# Altium PCB PCB_OLD old.PcbDoc
Units mm, origin at the board's own origin, x right, y up, seen from the top; angles counter-clockwise.
Board outline 65 x 33 mm, 2 copper layers (Top Layer, Bottom Layer); 45 components, 29 nets, 179 pads, 91 vias.
Unrouted connection lines stored in the file: 18.
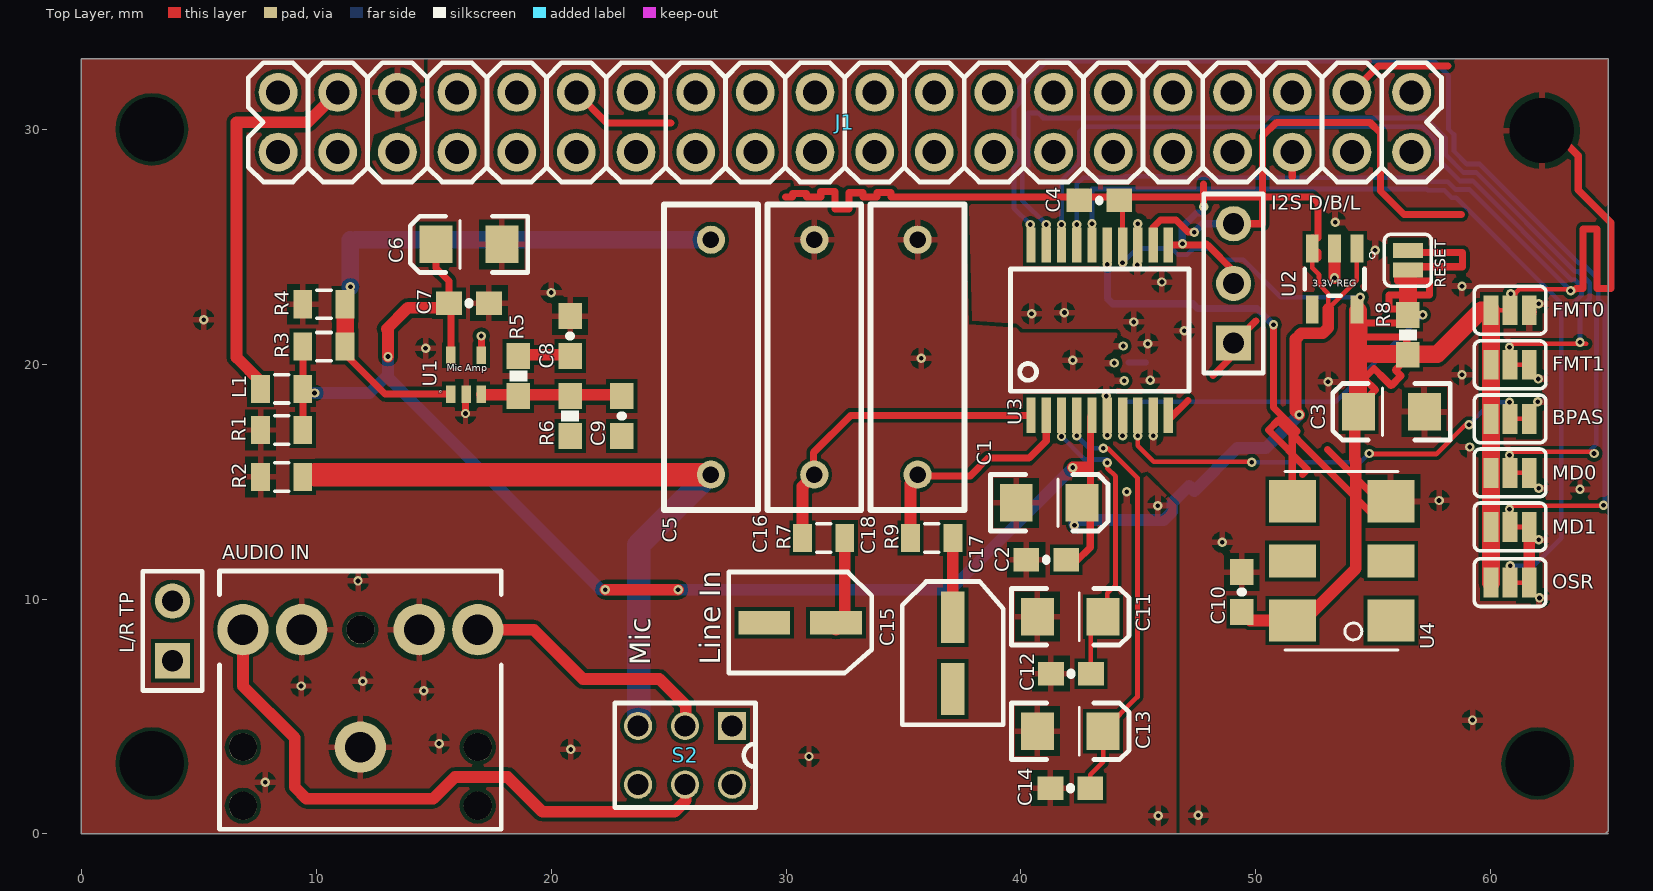
[diagram p0: Top Layer view]
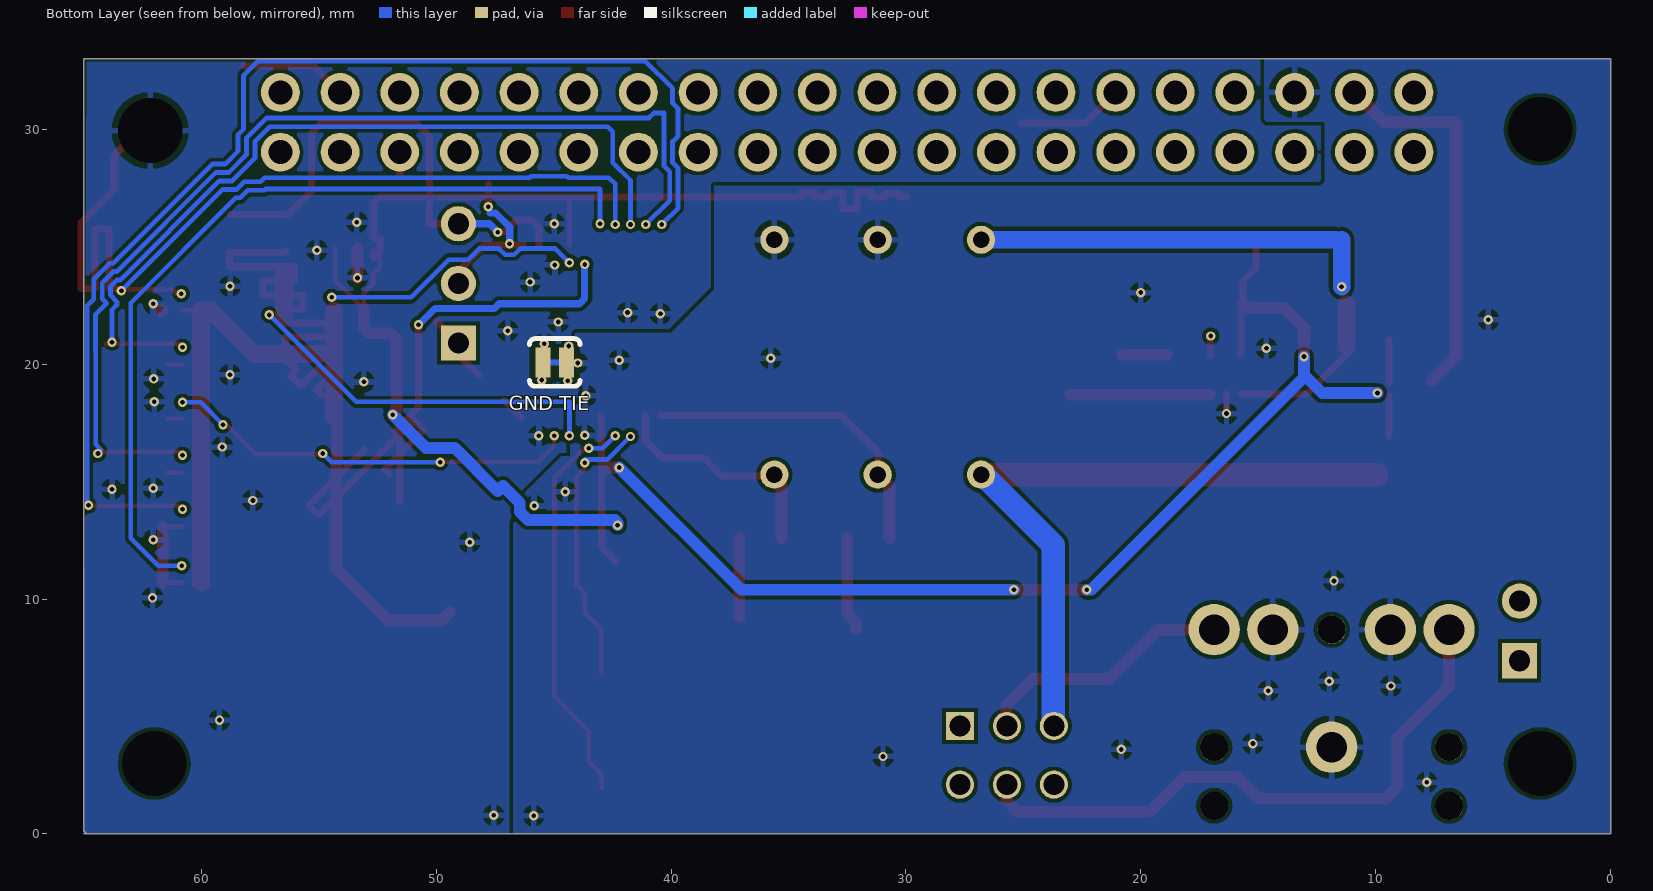
[diagram p1: Bottom Layer view, seen from below]

## Layer stack, top to bottom
Top Solder: solder mask 0.0102, Solder Resist, Dk 3.5
Top Layer: signal copper 0.0356
Dielectric 1: dielectric 0.32, FR-4, Dk 4.8
Bottom Layer: signal copper 0.0356
Bottom Solder: solder mask 0.0102, Solder Resist, Dk 3.5

## Board outline
0,0 65,0 64.875,0 65,0.125 65,33 0,33

## Design rules (kind name [scope] priority, off if disabled: settings)
Clearance [All] p1: gap=0.16
ComponentClearance [All] p1: gap=0.1 collisioncheckmode=3 verticalgap=0.1 showdistances=FALSE
HoleSize [All] p1: absolutevalues=TRUE maxlimit=5 minlimit=0.025 maxpercent=80.000 minpercent=20.000
MatchedLengths I2S [InNetClass('I2S')] p1: tolerance=10 checknetsindiffpair=FALSE checkdiffpairvsdiffpair=TRUE checkxsignals=TRUE checkothers=TRUE
MinimumSolderMaskSliver [All] p1: minsoldermaskwidth=0.004
PolygonConnect [All] p1: connectstyle=Relief reliefconductorwidth=0.254 reliefentries=4 polygonreliefangle="90 Angle" airgapwidth=0.254
RoutingVias [All] p1: holewidth=0.5 width=0.8 viastyle="Through Hole" minholewidth=0.2 minwidth=0.4 maxholewidth=1 maxwidth=1.5
SilkToSilkClearance [All] p1: silktosilkclearance=0.1
SilkToSolderMaskClearance [IsPad] p1 off: minsilkscreentomaskgap=0.07 clearancetoexposedcopper=TRUE
SolderMaskExpansion [All] p1: expansion=0.01
Width [All] p1: maxlimit=1 minlimit=0.2 preferedwidth=0.25
25 further rules are at their usual default settings.

## Classes and differential pairs
component class Schematic: BPAS FMT0 FMT1 MD0 MD1 OSR "SCK tp"
net class I2S: BCK DOUT LRCK

## Components (designator, comment, footprint, x,y, rotation, side; value= is the part's Value field where it differs from the comment)
"AUDIO IN" "Stereo jack with bypass switches. Ground when NC" AUDIO-JACK 11.875,3.7 r90 top
BPAS "" PAD-JUMPER-3-2OF3_NC_BY_TRACE_YES_SILK_FULL_BOX 60.825,17.675 r0 top net-tie
C1 "10uF" EIA3216 41.2,14.1 r0 top
C2 "0.1uF" 0603-CAP 41.075,11.675 r180 top
C3 "10uF" EIA3216 55.775,17.975 r180 top
C4 "0.1uF" 0603-CAP 43.333,26.975 r180 top
C5 "0.01uF Film" "WIMA PCM 10" 26.8,13.8 r90 top
C6 "10uF" EIA3216 16.5,25.1 r180 top
C7 "0.1uF" 0603-CAP 16.5,22.6 r0 top
C8 "1uF" 0603-CAP 20.8,21.2 r90 top
C9 "100pF" 0603-CAP 23,17.8 r270 top
C10 "0.01uF" 0603-CAP 49.4,10.3 r90 top
C11 "10uF" EIA3216 42.1,9.25 r0 top
C12 "0.1uF" 0603-CAP 42.125,6.825 r180 top
C13 "10uF" EIA3216 42.1,4.375 r0 top
C14 "0.1uF" 0603-CAP 42.1,1.95 r180 top
C15 "1uF" PANASONIC_B_ELECTRO 30.6,9 r0 top
C16 "0.01uF Film" "WIMA PCM 10" 31.2,13.8 r90 top
C17 "1uF" PANASONIC_B_ELECTRO 37.1,7.7 r90 top
C18 "0.01uF Film" "WIMA PCM 10" 35.6,13.8 r90 top
FMT0 "" PAD-JUMPER-3-2OF3_NC_BY_TRACE_YES_SILK_FULL_BOX 60.825,22.3 r180 top net-tie
FMT1 "" PAD-JUMPER-3-2OF3_NC_BY_TRACE_YES_SILK_FULL_BOX 60.825,19.975 r0 top net-tie
"GND TIE" "JUMPER-PAD-2-NC_BY_TRACE" PAD-JUMPER-2-NC_BY_TRACE_YES_SILK 44.95,20.075 r0 bottom net-tie
"I2S D/B/L" "I2S TP" HDR1X3 49.05,20.9 r90 top
J1 "Pi Connector" 2X20 32.5,30.3 r0 top
L1 "" 0805 8.525,18.95 r0 top
"L/R TP" "Audio TP" HDR1X2 3.875,7.375 r90 top
MD0 "" PAD-JUMPER-3-2OF3_NC_BY_TRACE_YES_SILK_FULL_BOX 60.825,15.375 r0 top net-tie
MD1 "" PAD-JUMPER-3-2OF3_NC_BY_TRACE_YES_SILK_FULL_BOX 60.825,13.075 r0 top net-tie
OSR "" PAD-JUMPER-3-2OF3_NC_BY_TRACE_YES_SILK_FULL_BOX 60.825,10.7 r0 top net-tie
R1 "2K" 0805 8.525,17.2 r180 top
R2 "2K" 0805 8.525,15.2 r0 top
R3 "1M" 0805 10.325,20.75 r0 top
R4 "1M" 0805 10.325,22.55 r180 top
R5 "10K" 0603-RES 18.6,19.5 r90 top
R6 "100K" 0603-RES 20.8,17.8 r270 top
R7 "100r" 0805 31.6,12.6 r0 top
R8 "10K" 0603-RES 56.475,21.25 r90 top
R9 "100r" 0805 36.2,12.6 r0 top
RESET "Push to Reset" PAD-JUMPER-2-NC_BY_PASTE_YES_SILK_FULL_BOX 56.475,24.425 r90 top (schematic designator S1)
S2 "Audio Source Selector" "Switch DPDT MCS221N-2017" 27.7,4.6 r270 top
U1 "MAX4466" SC70 16.375,19.55 r0 top
U2 "3.3V Reg - Pinout wrong here but correct footprint" SOT23-5 53.35,23.625 r180 top
U3 "PCM1803a" SSOP20 43.35,21.45 r0 top
U4 "24.576MHz OSCILLATOR" CRYSTAL-SMD-7.5X5.2-6PIN 53.65,11.625 r90 top

## Footprints (in the part's own frame and the unit in brackets; to place one, negate y for a bottom-side part, rotate by r counter-clockwise, add the part's x,y. Pads: shape width x height; smd on the part's side, far side on the other; paste and mask are expansions set on the pad)
2X20 [mil]
  round 65 hole 40: 1(-950,-50) 2(-950,50) 3(-850,-50) 4(-850,50) 5(-750,-50) 6(-750,50) 7(-650,-50) 8(-650,50) 9(-550,-50) 10(-550,50) 11(-450,-50) 12(-450,50) 13(-350,-50) 14(-350,50) 15(-250,-50) 16(-250,50) 17(-150,-50) 18(-150,50) 19(-50,-50) 20(-50,50) 21(50,-50) 22(50,50) 23(150,-50) 24(150,50) 25(250,-50) 26(250,50) 27(350,-50) 28(350,50) 29(450,-50) 30(450,50) 31(550,-50) 32(550,50) 33(650,-50) 34(650,50) 35(750,-50) 36(750,50) 37(850,-50) 38(850,50) 39(950,-50) 40(950,50)
  silkscreen extent -1000,-100 1000,100
0603-CAP [mm]
  rect 1.1x1 smd: 1(-0.85,0) 2(0.85,0)
  silkscreen extent 0,-0.03 0,0.03
0603-RES [mm]
  rect 1.1x1 smd: 1(-0.85,0) 2(0.85,0)
  silkscreen extent -0.23,-0.38 0.23,0.38
0805 [mil]
  rect 31.5x47.24 smd: 1(-35.43,0) 2(35.43,0)
  silkscreen extent -12,-24 12,24
AUDIO-JACK [mm]
  round 1.2 hole 1.2: 1(-2.5,5) 1(-2.5,-5) 1(0,5) 1(0,-5) 1(5,0)
  round 2.184 hole 1.3: RING(5,5) RSH(5,2.5) SLEEVE(0,0) TIP(5,-5) TSH(5,-2.5)
  silkscreen extent -3.5,-6 7.5,6
CRYSTAL-SMD-7.5X5.2-6PIN [mm]
  rect 1.8x2 smd: 1(-2.54,-2.1) 2(2.54,-2.1) 3(2.54,2.1) 4(-2.54,2.1)
  rect 1.4x2 smd: NC0(0,-2.1) NC1(0,2.1)
  silkscreen extent -3.8,-2.4 3.8,2.4
EIA3216 [mm]
  rect 1.4x1.6 smd: A(1.4,0) C(-1.4,0)
  silkscreen extent -2.5,-1.2 2.5,1.2
HDR1X2 [mm] "Connector; Header; 2 Position"
  rect 1.5x1.5 hole 0.9: 1(0,0)
  round 1.5 hole 0.9: 2(2.54,0)
  silkscreen extent -1.27,-1.27 3.81,1.27
HDR1X3 [mm] "Connector; Header; 3 Position"
  rect 1.5x1.5 hole 0.9: 1(0,0)
  round 1.5 hole 0.9: 2(2.54,0) 3(5.08,0)
  silkscreen extent -1.27,-1.27 6.35,1.27
PAD-JUMPER-2-NC_BY_PASTE_YES_SILK_FULL_BOX [mm]
  rect 0.635x1.27 smd: 1(-0.412,0) 2(0.412,0)
  silkscreen extent -1.1,-1 1.1,1
PAD-JUMPER-2-NC_BY_TRACE_YES_SILK [mil]
  rect 25x50 smd: 1(-20,0) 2(20,0)
  Top Layer lines w10: -15,0 15,0
  silkscreen extent -42,-40 42,40
PAD-JUMPER-3-2OF3_NC_BY_TRACE_YES_SILK_FULL_BOX [mil]
  rect 25x50 smd: 1(-32,0) 2(0,0) 3(32,0)
  Top Layer lines w8: 0,0 25,0
  silkscreen extent -60,-40 60,40
PANASONIC_B_ELECTRO [mm]
  rect 2.2x1 smd: +(1.524,0) -(-1.524,0)
  silkscreen extent -3.05,-2.15 3.05,2.15
SC70 [mm]
  rect 0.4x0.75 smd: 1(-0.65,-0.825) 2(0,-0.825) 3(0.65,-0.825) 4(0.65,0.825) 5(-0.65,0.825)
SOT23-5 [mm]
  rect 0.55x1.2 smd: 1(-0.95,-1.3) 2(0,-1.3) 3(0.95,-1.3) 4(0.95,1.3) 5(-0.95,1.3)
  silkscreen extent -1.73,-1.14 1.27,0.71
SSOP20 [mm]
  rect 0.4x1.5 smd: 1(-2.925,-3.625) 2(-2.275,-3.625) 3(-1.625,-3.625) 4(-0.975,-3.625) 5(-0.325,-3.625) 6(0.325,-3.625) 7(0.975,-3.625) 8(1.625,-3.625) 9(2.275,-3.625) 10(2.925,-3.625) 11(2.925,3.625) 12(2.275,3.625) 13(1.625,3.625) 14(0.975,3.625) 15(0.325,3.625) 16(-0.325,3.625) 17(-0.975,3.625) 18(-1.625,3.625) 19(-2.275,3.625) 20(-2.925,3.625)
  silkscreen extent -3.82,-2.6 3.8,2.6
"Switch DPDT MCS221N-2017" [mm]
  rect 1.2x1.2 hole 0.9: 1(0,0)
  round 1.2 hole 0.9: 2(0,-4) 3(2.5,0) 4(2.5,-4) C1(0,-2) C2(2.5,-2)
  silkscreen extent -0.97,-5 3.47,1
"WIMA PCM 10" [mm]
  round 1.2 hole 0.7: 1(1.5,0) 2(11.5,0)
  silkscreen extent 0,-2 13,2

## Part data
"AUDIO IN": library part AUDIO-JACK2PTH
BPAS FMT0 FMT1 MD0 MD1 OSR: library part JUMPER-PAD-3-2OF3_NC_BY_TRACE_SMALL, "JUMPER-PAD-3-2OF3_NC_BY_TRACE_SMALL"
C1 C3 C6 C11 C13: library part CAP_POL1206, "Capacitor PolarizedThese are standard SMD and PTH capacitors. Normally 10uF, 47uF, and 100uF in electrolytic and tantalum varieties. Always verify the external diameter of the through hole cap, it varies with capacity, voltage, and manufacturer. The EIA devices should be standard."
C2 C4 C7 C8 C9 C10 C12 C14: library part 0.1UF-25V-5%(0603)
C5 C16 C18: library part 0.1UF-50V-20%(PTH)KIT-EZ, "CAP-08370"
C15 C17: library part CAP_POLC, "Capacitor PolarizedThese are standard SMD and PTH capacitors. Normally 10uF, 47uF, and 100uF in electrolytic and tantalum varieties. Always verify the external diameter of the through hole cap, it varies with capacity, voltage, and manufacturer. The EIA devices should be standard."
"I2S D/B/L": library part "Header 3", "Header, 3-Pin"
J1: library part M20X2, "0.1\" spaced headers"
L1: library part INDUCTOR0805, "Inductors   Basic Inductor/Choke - 0603 and 1206. Footprints are not proven and vary greatly between part numbers. INDUCTOR POWER 3.3UH 4.0A SMD 0.197\" L x 0.197\" W x 0.177\" H (5.00mm x 5.00mm x 4.50mm)"
"L/R TP": library part "Header 2"
R1 R2 R3 R4 R7 R9: library part RESISTOR0805-RES, "ResistorBasic schematic elements and footprints for 0603, 1206, and PTH resistors."
R5 R6 R8: library part RESISTOR0603-RES
RESET: library part JUMPER-PAD-2-NC_BY_PASTEFULL-BOX-SILK
S2: library part SWITCH-DPDTPTH1
U1: library part MINI-DIN6PTH
U2: library part MIC52053.3V
U3: library part PCM1803SMD, "24-bit ADC"
U4: library part OSCILLATORSMD6

## Free pads (board coordinates)
  round 1.524 hole 2.75: 3(3,3) 3(3,30) 3(62,3) 3(62.175,29.95)

## Via types
v1: diameter 0.4, hole 0.2, Top Layer to Bottom Layer, 91 vias

## Nets (pads, with @x,y where several pads share a name; then routed paths per layer and width w, separated by ;. In a path a pad name is that pad's centre, name@x,y a point inside that pad or via, vN(x,y) a via of type N, cw(c..) or ccw(c..) an arc to the next point about the centre after c; other vN are vias at no path point)
3.3V: BPAS.1 C3.A C4.1 C10.1 FMT0.3 FMT1.1 MD0.1 MD1.1 OSR.1 R8.1 U2.5 U3.14 U4.4 | length 49.7
  Top Layer w0.2: C4.1@44.275,26.975 44.325,26.925 U3.14
  Top Layer w0.5: C10.1 49.765,9.085 U4.4 52.035,9.085 54.25,11.3 54.25,15.912 54.215,15.947 54.215,17.615 C3.A@54.35,17.75
  Top Layer w0.75: C3.A@54.35,17.75 54.35,20.45 ; U2.5@54.35,22.275 54.35,20.45 ; 55.075,20.425 57.725,20.425 59.553,22.253 ; R8.1@56.425,20.45 54.35,20.45 ; 59.6,22.3 FMT0.3 FMT1.1 BPAS.1 MD0.1 MD1.1 OSR.1
  Bottom Layer w0.2: v1(44.325,24.325) 44.925,24.925 46.424,24.925 46.684,24.665 47.066,24.665 47.326,24.925 48.157,24.925 48.632,24.45 49.468,24.45 51.068,22.85 v1(54.45,22.85)
5V: C1.A C2.1 C6.A C7.1 L1.2 R1.1 R3.1 U1.5 U2.1 U2.3 U3.5 | length 83.6
  Top Layer w0.2: U2.3 52.4,24.1 52.69,23.81 52.69,23.402 53.085,23.007 53.085,22.36 54.3,23.575 U2.1
  Top Layer w0.3: R1.1@9.425,16.925 L1.2@9.425,18.675 ; L1.2@9.425,19.225 R3.1@9.425,21.025 ; C6.A 15.1,24.1 15.65,23.55 C7.1 ; U1.5 C7.1@15.725,22.525 ; C2.1@42.35,11.6 42.95,12.2 42.95,14.125 42.95,17.75 U3.5
  Top Layer w0.5: v1(13.05,20.325) 13.05,21.45 13,21.5 13.9,22.4 15.45,22.4 C7.1 ; v1(22.3,10.4) v1(25.4,10.4) ; v1(42.2,15.6) 42.85,15.6 ; v1(51.85,17.85) 51.69,18.01 51.69,21.07 51.935,21.315 52.845,21.315 53.085,21.555 53.085,22.36
  Bottom Layer w0.5: v1(9.925,18.775) 12.275,18.775 13.05,19.55 v1(13.05,20.325) 13.05,19.45 22.1,10.4 v1(22.3,10.4) ; v1(25.4,10.4) 37,10.4 v1(42.2,15.6) ; v1(42.275,13.15) 42.275,13.255 42.385,13.365 46.078,13.365 46.435,13.722 46.435,14.105 47.155,14.825 47.38,14.6 49.215,16.435 50.435,16.435 v1(51.85,17.85)
AGND: "AUDIO IN.RSH" "AUDIO IN.SLEEVE" "AUDIO IN.TSH" "GND TIE.1" C1.C C2.2 C6.C C7.2 C8.2 C11.C C12.2 C13.C C14.2 C16.2 C18.2 J1.6 R1.2 R2.1 R4.2 U1.2 U3.6 | length 0.8
  Top Layer w0.3: v1(16.35,17.9) 16.35,18.7 U1.2
  other v1: 45.85,0.775 7.825,2.2 30.975,3.3 20.825,3.6 15.225,3.85 14.575,6.1 9.35,6.3 11.975,6.5 11.775,10.775 45.825,13.975 44.5,14.575 43.675,16.975 43.625,18.65 44.4,19.3 43.975,20.05 42.2,20.175 35.75,20.25 14.65,20.675 44.35,20.775 5.2,21.9 20,23.05
AUDIOIN_L: "AUDIO IN.TIP" "L/R TP.1" S2.C1 | length 10.8
  Top Layer w0.5: 16.875,8.7 19.262,8.7 ; 19.262,8.687 21.35,6.6 24.6,6.6 25.725,5.475 S2.C1@25.725,4.875
AUDIOIN_R: "AUDIO IN.RING" "L/R TP.2" S2.C2 | length 26.6
  Top Layer w0.5: 6.875,8.7 6.875,6.3 9.075,4.1 9.075,2 9.575,1.5 14.975,1.5 15.9,2.425 18.15,2.425 19.625,0.95 22.875,0.95 25.25,0.95 25.725,1.425 S2.C2@25.725,2.375
BCK: "I2S D/B/L.2" J1.12 U3.11 | length 41
  Top Layer w0.3: J1.12 22.365,30.275 25.1,30.275 ; 29.975,27.125 30.275,27.125 30.275,27.275 30.875,27.275 30.875,27.125 31.475,27.125 31.475,27.355 32.075,27.355 32.075,27.125 32.075,26.607 32.675,26.607 32.675,27.125 32.675,27.3 33.275,27.3 33.275,27.125 33.875,27.125 33.875,27.306 34.475,27.306 34.475,27.125 52.4,27.125 52.65,26.875 52.65,26.575 52.65,25.975 52.65,25.375 52.384,25.375 52.384,24.775 52.65,24.775 52.65,24.525 ; v1(47.775,26.7) 47.775,27.125 47.775,27.675 ; 47.905,25.12 47.95,25.075 ; 49.05,23.44 49.05,23.975 47.95,25.075 ; v1@46.875,25.075 U3.11 v1@46.875,25.075 ; v1@46.875,25.075 47.95,25.075 ; v1@46.875,25.075 47.95,25.075
  Bottom Layer w0.3: v1(46.875,25.125) 46.865,25.135 46.865,25.836 47.469,26.44 47.715,26.44
BPAS: BPAS.2 U3.8 | length 17.6
  Top Layer w0.2: v1(44.975,16.95) 44.975,16.526 45.651,15.85 v1@49.825,15.85 ; v1@54.785,16.175 57.675,16.175 58.925,17.425 v1(59.075,17.425)
  Bottom Layer w0.2: v1(49.825,15.825) 54.45,15.825 v1(54.825,16.2) ; v1(59.075,17.425) 60.025,18.375 v1(60.8,18.375)
DGND: "GND TIE.2" BPAS.3 C3.C C4.2 C10.2 FMT0.1 FMT1.3 MD0.3 MD1.3 OSR.3 pad.3@62.175,29.95 RESET.2 U2.2 U3.9 U3.13 U4.2 | length 3.7
  Top Layer w0.5: v1(53.35,23.675) U2.2 ; OSR.3 MD1.3 ; FMT0.1 FMT0.1@61.713,22.225
  other v1: 47.55,0.8 59.225,4.85 62.075,10.05 48.575,12.425 62.05,12.525 57.8,14.2 63.8,14.675 62.05,14.725 59.1,16.475 45.625,16.95 62,18.4 53.075,19.25 45.5,19.325 62.025,19.375 58.775,19.55 45.4,20.875 46.95,21.425 44.8,21.8 40.45,22.15 41.85,22.2 62.05,22.575 58.775,23.325 46,23.5 44.95,24.225 55.075,24.85 44.975,25.975 53.375,26.05
DOUT: "I2S D/B/L.3" J1.38 U3.12 | length 39.7
  Top Layer w0.3: U3.12 45.625,25.825 45.935,26.135 46.603,26.135 47.114,25.625 v1(47.375,25.625) ; 49.05,25.98 50.286,25.98 50.286,29.711 50.875,30.3 54.85,30.3 55.3,29.85 55.3,27.375 56.3,26.375 58.75,26.375 ; J1.38 55.226,32.705 58.169,32.705 ; 63.044,29.556 63.725,28.875 63.725,27.425 65.125,26.025 65.125,23.225 64.525,23.225 64.525,25.753 63.925,25.753 63.925,23.225 63.625,23.225
  Bottom Layer w0.3: v1(47.375,25.625) 47.73,25.98 49.05,25.98
FMT0: FMT0.2 U3.17 | length 28.1
  Top Layer w0.2: v1(60.85,23) 61.06,23 61.06,23.043 61.213,23.195 63.655,23.195 63.585,23.125 v1(63.4,23.125)
  Bottom Layer w0.2: v1(42.375,25.95) 42.375,27.675 42.645,27.945 44.38,27.945 44.435,28 45.965,28 46.02,27.945 57.296,27.945 57.477,27.764 58.168,27.764 58.489,27.442 59.083,27.442 v1(63.4,23.125)
FMT1: FMT1.2 U3.18 | length 34.9
  Top Layer w0.2: v1(60.8,20.725) 60.945,20.87 64.07,20.87
  Bottom Layer w0.2: v1(41.725,25.95) 41.725,27.83 42.476,28.58 42.476,29.9 42.691,30.115 57.08,30.115 57.716,29.48 57.716,28.766 58.679,27.802 59.232,27.802 63.449,23.585 63.591,23.585 63.86,23.316 63.86,22.934 63.591,22.665 63.591,22.525 63.801,22.315 v1(63.801,20.94)
LINEIN_L: C9.2 C15.- C17.- R6.2 S2.1 S2.3 U1.4 | length 0.8
  Top Layer w0.3: U1.4 v1(17.025,21.2)
LRCK: "I2S D/B/L.1" J1.35 U3.10 | length 41.1
  Top Layer w0.3: 48.175,19.525 49.05,20.4 49.05,20.9 50,21.85 ; 51.55,27.975 J1.35 ; 51.988,15.312 52.2,15.525 50.531,17.193 50.956,17.617 52.624,15.949 55.016,13.557 55.44,13.981 53.048,16.373 53.05,16.375 ; 54.875,18.7 55.087,18.912 54.603,19.396 55.027,19.82 55.511,19.336 55.762,19.086 56.186,19.51 55.936,19.761 56.36,20.185 56.425,20.25 56.425,20.55 56.425,21.15 54.596,21.15 54.596,21.75 56.425,21.75 56.639,21.75 56.639,22.35 56.425,22.35 55.672,22.35 55.672,22.95 56.425,22.95 57.385,22.95 57.385,23.55 56.425,23.55 56.029,23.55 56.029,24.15 56.425,24.15 58.803,24.15 58.803,24.75 56.425,24.75 56.425,24.825 ; U3.10@46.375,17.725 47.113,18.462 U3.10@46.375,17.725
MAX_IN+: C5.2 R3.2 R4.1 U1.1 | length 24.2
  Top Layer w0.3: R3.2@11.175,20.475 12.925,18.725 U1.1
  Top Layer w0.75: R3.2 R4.1
  Bottom Layer w0.75: v1(11.45,23.3) 11.45,25.3 ; 11.7,25.3 C5.2
MAX_IN-: C9.1 R5.1 R6.1 U1.3 | length 6
  Top Layer w0.5: U1.3@17.05,18.7 18.875,18.7 C9.1@23,18.7
MD0: MD0.2 U3.19 | length 43.8
  Top Layer w0.2: v1(60.8,16.125) 60.945,16.27 64.33,16.27 v1(64.4,16.2)
  Bottom Layer w0.2: v1(41.075,25.95) 40.06,26.965 40.06,28.196 40.295,28.431 40.295,30.695 40.729,30.695 40.94,30.485 57.22,30.485 58.075,29.629 58.075,28.915 58.829,28.162 59.381,28.162 63.598,23.945 63.74,23.945 64.22,23.465 64.22,22.785 64.03,22.595 64.5,22.125 64.5,20.509 64.495,20.505 64.495,16.585 64.255,16.345
MD1: MD1.2 U3.20 | length 50.9
  Top Layer w0.2: v1(60.8,13.825) 60.945,13.97 64.77,13.97 v1(64.8,14)
  Bottom Layer w0.2: v1(40.4,25.95) 39.7,26.65 39.7,28.345 39.936,28.58 39.936,29.48 39.7,29.715 39.7,30.885 39.936,31.12 39.936,31.746 41.089,32.9 57.6,32.9 58.199,32.301 58.199,30.015 58.435,29.778 58.435,29.065 58.978,28.522 59.53,28.522 63.747,24.305 63.889,24.305 64.58,23.614 64.58,22.77 64.86,22.49 64.86,20.36 64.855,20.356 64.855,16.395 64.86,16.391 64.86,14.06 v1@64.855,14.055
MIC_A: C5.1 R2.2 S2.2 S2.4 | length 28.5
  Top Layer w1: 9.95,15.3 C5.1
  Bottom Layer w1: S2.2@23.725,4.875 23.725,12.3 C5.1@26.725,15.3
NetC8_1: C8.1 R5.2 | length 1.9
  Top Layer w0.5: R5.2@18.875,20.4 C8.1@20.8,20.4
NetC11_A: C11.A C12.1 U3.3 | length 11.9
  Top Layer w0.2: C12.1 42.975,8.725 C11.A 43.675,9.425 43.675,10.25 44.025,10.6 44.025,15.225 43.675,15.575 v1(43.675,15.8)
  Bottom Layer w0.2: v1(41.725,16.925) 42.709,15.94 v1@43.66,15.94
NetC13_A: C13.A C14.1 U3.4 | length 17.4
  Top Layer w0.2: C14.1 42.95,2.525 43.5,3.075 C13.A 44.96,5.835 44.96,15.166 43.701,16.425 v1(43.5,16.425)
  Bottom Layer w0.2: v1(42.375,16.95) 42.9,16.425 v1(43.5,16.425)
NetC15_+: C15.+ R7.2 | length 4.1
  Top Layer w0.5: C15.+@32.124,8.7 32.124,9.024 32.5,9.4 R7.2
NetC17_+: C17.+ R9.2 | length 3.4
  Top Layer w0.5: C17.+ R9.2
OSR: OSR.2 U3.16 | length 36.1
  Bottom Layer w0.2: v1(43.025,25.975) 43.025,27.459 57.272,27.459 57.328,27.404 58.019,27.404 58.34,27.082 58.524,27.082 63,22.607 63,12.6 61.825,11.425 v1(60.825,11.425)
PDWN: R8.2 RESET.1 U3.7 | length 17.5
  Top Layer w0.75: R8.2 RESET.1@56.475,23.834
  Bottom Layer w0.2: v1(44.325,16.95) 44.325,18.4 53.4,18.4 v1(57.1,22.1)
SCK: U3.15 U4.3 | length 17
  Top Layer w0.3: v1(50.75,21.675) 50.75,18.154 51.756,17.147 51.55,16.941 U4.3
  Bottom Layer w0.3: v1(43.675,24.25) 43.675,22.8 43.9,22.575 47.325,22.575 47.52,22.38 50.045,22.38 v1(50.75,21.675)
V_IN: J1.4 L1.1 | length 16.3
  Top Layer w0.5: L1.1@7.615,19.275 6.6,20.29 6.6,30.3 9.64,30.3 J1.4
VINL_B: C16.1 R7.1 U3.1 | length 13.7
  Top Layer w0.3: C16.1@31.175,15.275 31.175,16.25 32.75,17.825 U3.1
  Top Layer w0.5: R7.1 30.7,14.8 C16.1@31.175,15.275
VINR_B: C18.1 R9.1 U3.2 | length 9.9
  Top Layer w0.3: C18.1@35.625,15.25 37.85,15.25 38.6,16 40.35,16 41.075,16.725 U3.2
  Top Layer w0.5: R9.1 35.3,14.925 C18.1@35.625,15.25
pads on no net: "AUDIO IN.1" J1.1 J1.2 J1.3 J1.5 J1.7 J1.8 J1.9 J1.10 J1.11 J1.13 J1.14 J1.15 J1.16 J1.17 J1.18 J1.19 J1.20 J1.21 J1.22 J1.23 J1.24 J1.25 J1.26 J1.27 J1.28 J1.29 J1.30 J1.31 J1.32 J1.33 J1.34 J1.36 J1.37 J1.39 J1.40 U2.4 U4.1 U4.NC0 U4.NC1

## Polygon pours and split planes (outlines as drawn)
DGND on Bottom Layer "Bottom DGND Pour" (solid, pour order 10): 64.875,32.875 65.025,0 46.725,0 19.625,27.1 12.4,27.1 11.45,27.1 10.825,27.725 11.85,28.75 11.85,33
AGND on Bottom Layer "Bottom AGND Pour" (solid, pour order 8): 0,33 14.75,33 14.75,30.425 14.65,30.325 12.175,30.325 12.175,27.775 12.2,27.75 12.35,27.6 38.15,27.6 38.15,23.2 38.525,22.825 40,21.35 40.35,21.35 44.125,21.35 44.2,21.275 44.775,20.7 44.775,18.95 44.475,18.95 44.175,18.65 44.3,18.525 44.3,16.075 44.675,16.075 46.8,13.95 46.725,13.875 46.725,0 -0.025,0
DGND on Top Layer "Top DGND Pour" (solid, pour order 6): 12.275,33 10.3,33 10.3,23.45 20.575,23.45 46.6,0 53.525,0 65,0 65,33 64.875,33
AGND on Top Layer "Top AGND Pour" (solid, pour order 2): 0,33 14.575,33 14.575,30.55 13.387,30.113 12.45,29.767 12.18,28.612 12.7,27.725 12.725,27.7 37.6,27.7 37.775,21.7 39.8,21.55 40,21.35 43.625,21.35 44.15,21.35 44.75,20.75 44.775,20.725 44.775,19.05 44.225,19.05 44,18.825 44.025,18.8 44.025,16.725 44.025,16.6 46.05,14.575 46.6,14.025 46.6,0 0.05,0 0,0

## Silkscreen, mask and mechanical layers (free items; w line width, h text height)
Top Overlay:
  text "3.3V REG" at 52.4,23.2 h0.5
  text "Mic Amp" at 15.55,19.6 h0.5
  text "o" at 15.225,18.725 h0.25
  text "Line In" at 27.2,7.2 h0.86 r90
  text "Mic" at 24.225,7.175 h0.86 r90